# Altium PCB PCB1.PcbDoc (part 1 of 2)
Units mm, origin at the board's own origin, x right, y up, seen from the top; angles counter-clockwise.
Board outline 142.1 x 63.5 mm, 2 copper layers (Top Layer, Bottom Layer); 91 components, 105 nets, 352 pads, 86 vias.
Unrouted connection lines stored in the file: 3.
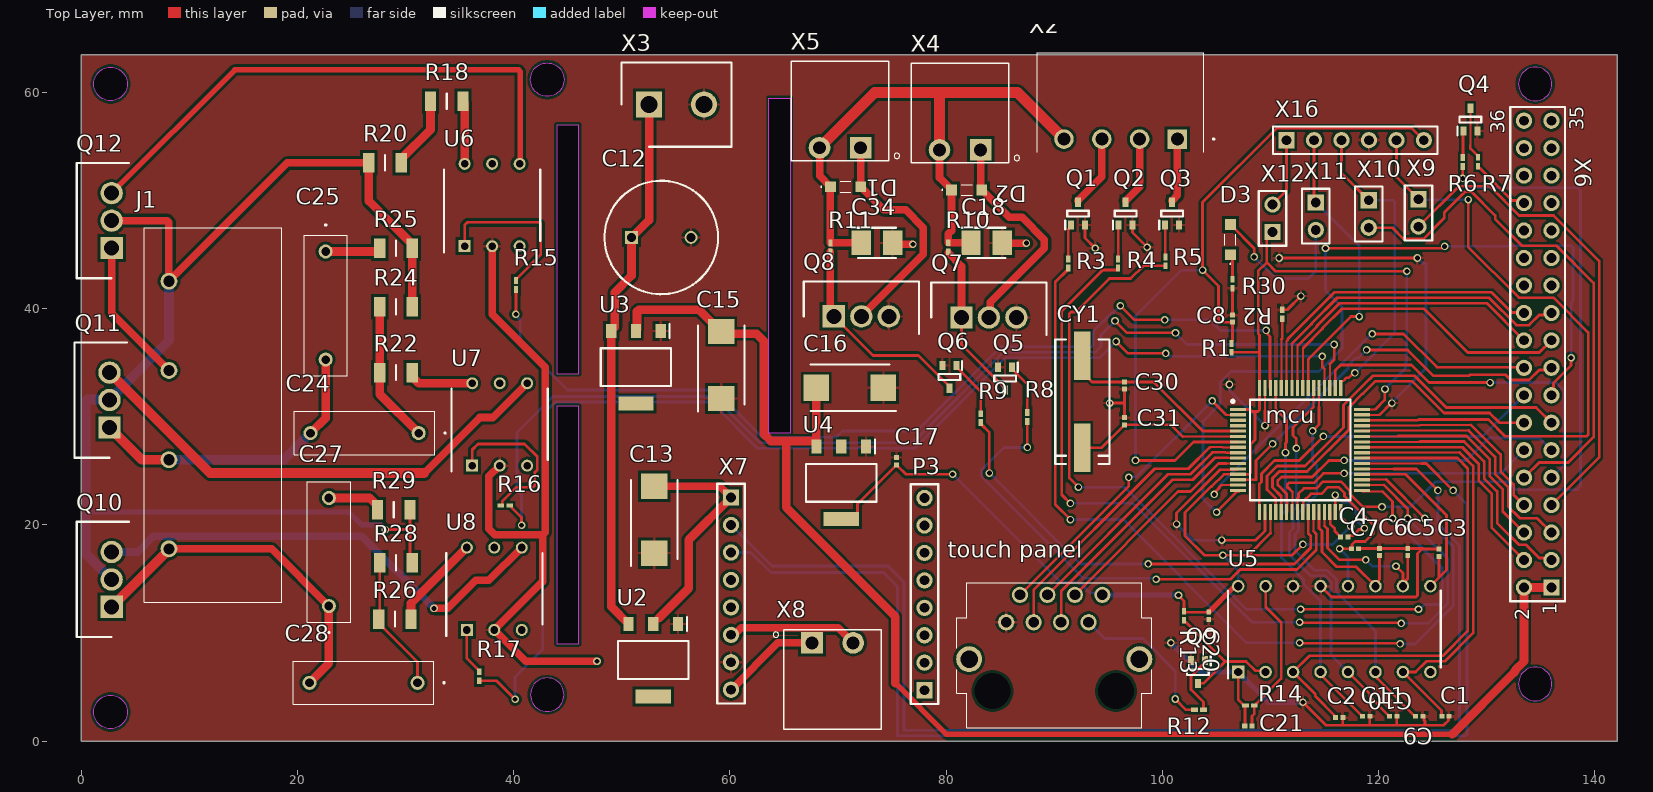
[diagram p0: Top Layer view]
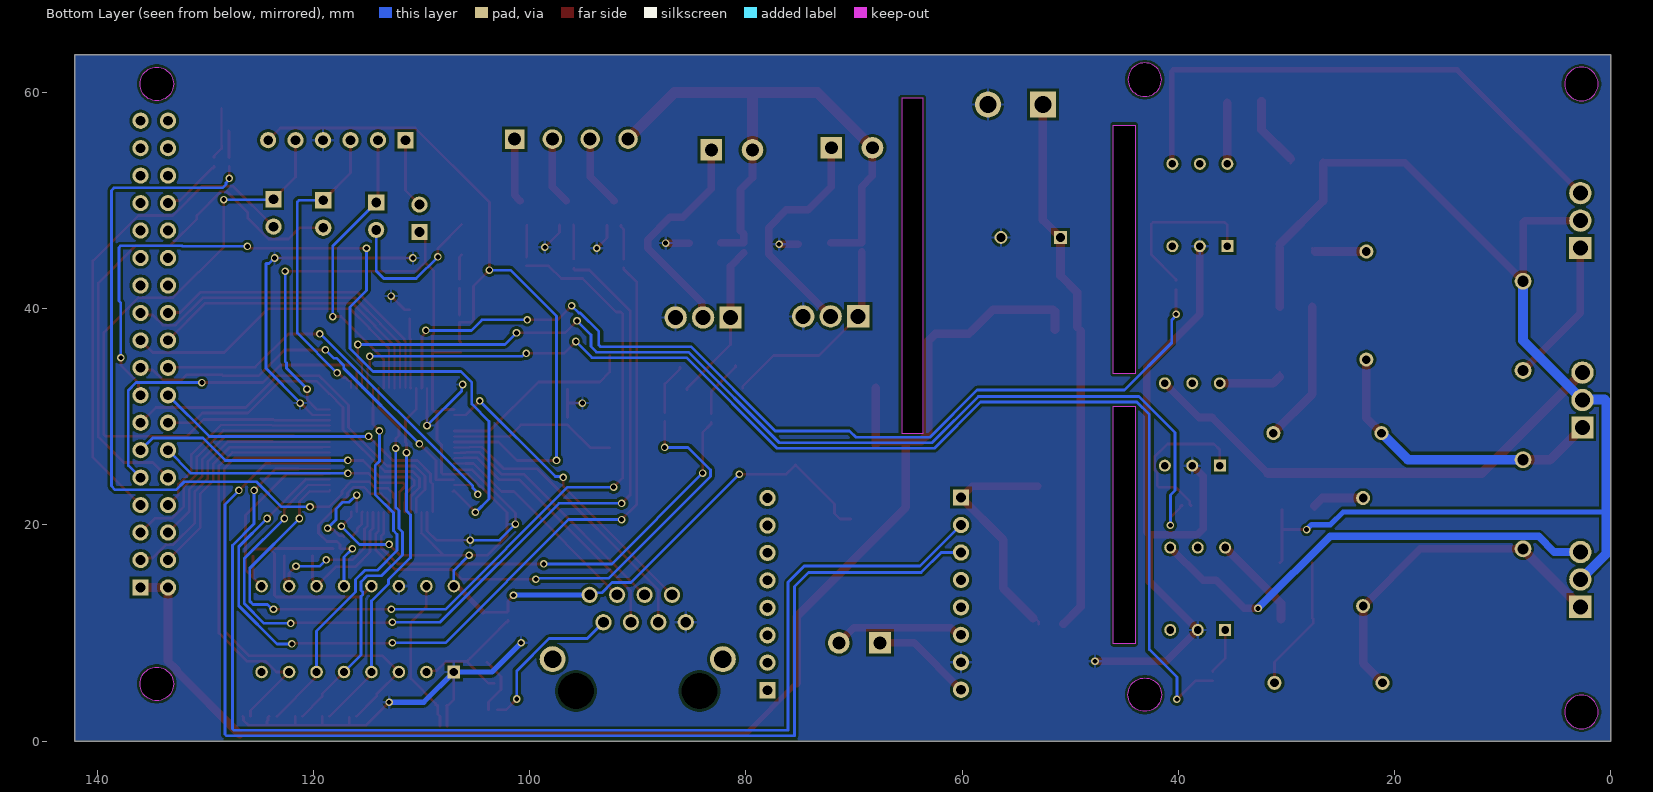
[diagram p1: Bottom Layer view, seen from below]

## Layer stack, top to bottom
Top Solder: solder mask 0.0102, Solder Resist, Dk 3.5
Top Layer: signal copper 0.0356
Dielectric 1: dielectric 0.32, FR-4, Dk 4.8
Bottom Layer: signal copper 0.0356
Bottom Solder: solder mask 0.0102, Solder Resist, Dk 3.5

## Board outline
0,0 142.1,0 142.1,63.5 0,63.5
cut-out: 2.7,1.148 cw(c2.7,2.7) 1.148,2.7 cw(c2.7,2.7) 2.7,4.252 cw(c2.7,2.7) 4.252,2.7 cw(c2.7,2.7)
cut-out: 2.7,59.248 cw(c2.7,60.8) 1.148,60.8 cw(c2.7,60.8) 2.7,62.352 cw(c2.7,60.8) 4.252,60.8 cw(c2.7,60.8)
cut-out: 43.1,59.648 cw(c43.1,61.2) 41.548,61.2 cw(c43.1,61.2) 43.1,62.752 cw(c43.1,61.2) 44.652,61.2 cw(c43.1,61.2)
cut-out: 41.548,4.3 ccw(c43.1,4.3) 43.1,2.748 ccw(c43.1,4.3) 44.652,4.3 ccw(c43.1,4.3) 43.1,5.852 ccw(c43.1,4.3)
cut-out: 132.948,5.3 ccw(c134.5,5.3) 134.5,3.748 ccw(c134.5,5.3) 136.052,5.3 ccw(c134.5,5.3) 134.5,6.852 ccw(c134.5,5.3)
cut-out: 132.948,60.8 ccw(c134.5,60.8) 134.5,59.248 ccw(c134.5,60.8) 136.052,60.8 ccw(c134.5,60.8) 134.5,62.352 ccw(c134.5,60.8)
cut-out: 46,31 44,31 44,9 46,9
cut-out: 46,34 46,57 44,57 44,34
cut-out: 63.6,59.5 65.6,59.5 65.6,28.5 63.6,28.5

## Design rules (kind name [scope] priority, off if disabled: settings)
Clearance [All] p1: gap=0.254 ignorepadtopadclearanceinfootprint=FALSE except(0: Arc-Hole Track-Hole SMDPad-Hole THPad-Hole Via-Hole Fill-Hole Poly-Hole Region-Hole Text-Hole)
PolygonConnect [All] p1: connectstyle=Relief reliefconductorwidth=0.254 reliefentries=4 polygonreliefangle="90 Angle" airgapwidth=0.254
RoutingVias [All] p1: holewidth=0.711 width=1.27 viastyle="Through Hole" minholewidth=0.711 minwidth=1.27 maxholewidth=0.711 maxwidth=1.27
SolderMaskExpansion [All] p1: expansion=0.102 istentingtop=FALSE
Width [All] p1: maxlimit=0.254 minlimit=0.254 preferedwidth=0.254
30 further rules are at their usual default settings.

## Components (designator, comment, footprint, x,y, rotation, side; value= is the part's Value field where it differs from the comment)
C1 "02013A0R5CAT2A" CAPC0603X33N 126.2,2.3 r0 top
C2 "02013A0R5CAT2A" CAPC0603X33N 116.365,2.2 r0 top
C3 "02013A0R5CAT2A" CAPC0603X33N 125.6,17.435 r90 top
C4 "02013A100BAT2A" CAPC0603X33N 116.835,18.9 r180 top
C5 "02013A0R5CAT2A" CAPC0603X33N 122.7,17.5 r90 top
C6 "02013A0R5CAT2A" CAPC0603X33N 120.1,17.5 r90 top
C7 "02013A0R5CAT2A" CAPC0603X33N 117.835,17.8 r0 top
C8 "02013A0R5CAT2A" CAPC0603X33N 106.5,39.1 r90 top
C9 "02013A0R5CAT2A" CAPC0603X33N 123.765,2.3 r0 top
C10 "02013A0R5CAT2A" CAPC0603X33N 121.365,2.3 r0 top
C11 "02013A0R5CAT2A" CAPC0603X33N 118.865,2.3 r0 top
C12 "108CKE025M" CAPPRD550W60D1050H2150 50.9,46.6 r0 top
C13 "293D107X9016DW2E3" CAPPM7343X310N 53,20.5 r90 top
C15 "293D107X9016DW2E3" CAPPM7343X310N 59.2,34.8 r90 top
C16 "293D107X9016DW2E3" CAPPM7343X310N 71.1,32.7 r180 top
C17 "02013A0R5CAT2A" CAPC0603X33N 75.4,25.9 r90 top
C18 "TH3B685M016C1800" CAPPM3528X210N 83.75,46.1 r0 top (schematic designator C?)
C20 "02013A0R5CAT2A" CAPC0603X33N 104.3,11.6 r270 top
C21 "02013A0R5CAT2A" CAPC0603X33N 107.965,1.4 r0 top
C24 "B32921C3333M" B32921C3333M 31.2,28.5 r180 top
C25 "B32921C3333M" B32921C3333M 22.6,45.3 r270 top
C27 "B32921C3333M" B32921C3333M 22.9,12.5 r90 top
C28 "B32921C3333M" B32921C3333M 31.1,5.4 r180 top
C30 "02013A100BAT2A" CAPC0603X33N 96.5,32.9 r90 top
C31 "02013A100BAT2A" CAPC0603X33N 96.5,29.6 r270 top
C34 "TH3B685M016C1800" CAPPM3528X210N 73.6,46.1 r0 top
CY1 "ECS-110-S-5P" CSM-7 92.6,31.4 r90 top
D1 "12-21_S2C-FR2S2L_2C" 1221S2CFR2S2L2C 70.7,51.3 r0 top
D2 "12-21_S2C-FR2S2L_2C" 1221S2CFR2S2L2C 81.9,51 r0 top
D3 "12-21_S2C-FR2S2L_2C" 1221S2CFR2S2L2C 106.3,46.4 r90 top
J1 "1-1437667-0" 114376670 8.1,17.79 r90 top
mcu "STM32F411RET6TR" QFP50P1200X1200X160-64N 112.75,26.938 r0 top
P3 "Header 8" HDR1X8 78,4.72 r90 top
Q1 "BFT92W" SOT65P210X110-3N 92.2,48.8 r90 top
Q2 "BFT92W" SOT65P210X110-3N 96.6,48.8 r90 top
Q3 "BFT92W" SOT65P210X110-3N 100.9,48.8 r90 top
Q4 "BFT92W" SOT65P210X110-3N 128.5,57.5 r90 top
Q5 "BFT92W" SOT65P210X110-3N 85.45,33.55 r270 top
Q6 "BFT92W" SOT65P210X110-3N 80.3,33.7 r270 top
Q7 "IRFZ48NPBF" TO254P483X1016X1994-3P 81.42,39.2 r0 top
Q8 "IRFZ48NPBF" TO254P483X1016X1994-3P 69.62,39.3 r0 top
Q9 "BFT92W" SOT65P210X110-3N 103.3,6.4 r270 top
Q10 "ISITICI_1" TO254P483X1016X1994-3P 2.8,12.42 r90 top
Q11 "ISITICI_2" TO254P483X1016X1994-3P 2.6,29.02 r90 top
Q12 "MOTOR" TO254P483X1016X1994-3P 2.8,45.62 r90 top
R1 "CPF0201D100RE1" RESC0603X28N 106.4,36.388 r270 top
R2 "CPF0201D100RE1" RESC0603X28N 111.1,39.5 r270 top
R3 "GREEN" RESC0603X28N 91.3,44.188 r270 top
R4 "RED" RESC0603X28N 95.9,44.188 r270 top
R5 "BLUE" RESC0603X28N 100.3,44.388 r270 top
R6 "CPF0201D100RE1" RESC0603X28N 127.8,53.588 r90 top
R7 "CPF0201D100RE1" RESC0603X28N 129.2,53.6 r90 top
R8 "CPF0201D100RE1" RESC0603X28N 87.5,29.988 r90 top
R9 "CPF0201D100RE1" RESC0603X28N 83.2,29.888 r90 top
R10 "CPF0201D100RE1" RESC0603X28N 80.2,45.7 r270 top
R11 "CPF0201D100RE1" RESC0603X28N 69.3,45.688 r270 top
R12 "CPF0201D100RE1" RESC0603X28N 103.388,2.9 r180 top
R13 "CPF0201D100RE1" RESC0603X28N 102,11.6 r270 top
R14 "CPF0201D100RE1" RESC0603X28N 108.1,3.3 r0 top
R15 "CPF0201D100RE1" RESC0603X28N 40.2,42.2 r270 top
R16 "CPF0201D100RE1" RESC0603X28N 39.212,21.8 r0 top
R17 "CPF0201D100RE1" RESC0603X28N 36.8,6 r270 top
R18 "CRCW12061K00JNEAC" RESC3216X60N 33.8,59.2 r0 top
R20 "CRCW12061K00JNEAC" RESC3216X60N 28.1,53.5 r180 top
R22 "CRCW12061K00JNEAC" RESC3216X60N 29.1,34.1 r0 top
R24 "CRCW12061K00JNEAC" RESC3216X60N 29.1,40.2 r180 top
R25 "CRCW12061K00JNEAC" RESC3216X60N 29.1,45.6 r0 top
R26 "CRCW12061K00JNEAC" RESC3216X60N 29,11.3 r0 top
R28 "CRCW12061K00JNEAC" RESC3216X60N 29.1,16.5 r180 top
R29 "CRCW12061K00JNEAC" RESC3216X60N 28.9,21.4 r0 top
R30 "CPF0201D100RE1" RESC0603X28N 106.5,42.312 r90 top
"touch panel" "100616-2" 1006162 94.45,13.54 r270 top
U2 "AMS1117-5.0" SOT229P700X180-4N 52.9,7.5 r270 top
U3 "AMS1117-5.0" SOT229P700X180-4N 51.3,34.6 r270 top
U4 "AMS1117-5.0" SOT229P700X180-4N 70.3,23.9 r270 top
U5 "ULN2003A" DIP794W56P254L1888H533Q16N 115.91,10.37 r90 top
U6 "MOC3083SM" DIP762W51P254L851H508Q6N 38,49.6 r90 top
U7 "MOC3083SM" DIP762W51P254L851H508Q6N 38.7,29.3 r90 top
U8 "MOC3083SM" DIP762W51P254L851H508Q6N 38.2,14.1 r90 top
X2 "RGB" 1844236 101.4,55.7 r180 top
X3 "+12V GND" SHDR2W100P0X508_1X2_1020X780X1200P 52.52,58.9 r0 top
X4 "ALEV" PHOENIX_1803277 81.295,54.7 r180 top
X5 "ODUN" PHOENIX_1803277 70.195,54.9 r180 top
X6 "Header 18X2" HDR2X18 136,14.22 r90 top (schematic designator header)
X7 "speaker" HDR1X8 60.1,22.54 r270 top
X8 "" PHOENIX_1803277 69.5,9.1 r0 top
X9 "Header 2" HDR1X2 123.7,50.14 r270 top
X10 "Header 2" HDR1X2 119.1,50.04 r270 top
X11 "Header 2" HDR1X2 114.2,49.84 r270 top
X12 "Header 2" HDR1X2 110.2,47.1 r90 top
X16 "program socket" HDR1X6 111.5,55.6 r0 top

## Footprints (in the part's own frame and the unit in brackets; to place one, negate y for a bottom-side part, rotate by r counter-clockwise, add the part's x,y. Pads: shape width x height; smd on the part's side, far side on the other; paste and mask are expansions set on the pad)
1221S2CFR2S2L2C [mm]
  rect 1x1 smd: 1(-1.4,0) 2(1.4,0)
  silkscreen extent -2.3,-0.5 0.5,0.5, body extent -1.5,-0.5 1.5,0.5, height 1.89
1006162 [mm]
  round 1.5 hole 1: 1(0,0) 2(2.54,-1.27) 3(0,-2.54) 4(2.54,-3.81) 5(0,-5.08) 6(2.54,-6.35) 7(0,-7.62) 8(2.54,-8.89)
  round 2.4 hole 1.6: MH1(5.95,3.43) MH2(5.95,-12.32)
  round 1.665 hole 3.33 unplated: MH3(8.9,1.27) MH4(8.9,-10.16)
  silkscreen extent -1.1,-13.44 12.3,4.55, body extent -0.79,-13.47 12.61,4.53, height 16.61
1844236 [mm]
  rect 1.8x1.8 hole 1.2: 1(0,0)
  round 1.8 hole 1.2: 2(3.5,0) 3(7,0) 4(10.5,0)
  silkscreen extent -3.4,-8 12.95,1.2, body extent 0,-3.4 9.2,7.25, height 2.45
114376670 [mm]
  round 1.557 hole 1.038: 1(0,0) 2(8.255,0) 3(16.51,0) 4(24.765,0)
  silkscreen extent -4.95,-10.41 29.72,2.29, body extent -4.96,-10.41 29.72,2.29, height 13.47
B32921C3333M [mm]
  round 1.3 hole 0.8: 1(0,0) 2(10,0)
  silkscreen extent -2.5,-2 11.5,2, body extent -1.5,-2 11.5,2, height 9.1
CAPC0603X33N [mm]
  rect 0.47x0.44 smd: 1(-0.335,0) 2(0.335,0)
  body extent -0.3,-0.15 0.3,0.15, height 0.33
CAPPM3528X210N [mm]
  rect 1.8x2.25 smd: 1(-1.45,0) 2(1.45,0)
  silkscreen extent -2.35,-1.4 1.75,1.4, body extent -1.86,-1.54 1.87,1.53, height 2.13
CAPPM7343X310N [mm]
  rect 2.35x2.45 smd: 1(-3.1,0) 2(3.1,0)
  silkscreen extent -4.28,-2.15 3.65,2.15, body extent -3.59,-2.21 3.6,2.21, height 2.92
CAPPRD550W60D1050H2150 [mm]
  rect 1.2x1.2 hole 0.8: 1(0,0)
  round 1.2 hole 0.8: 2(5.5,0)
  silkscreen extent -2.5,-5.25 8,5.25, body extent -2.5,-5.25 8,5.25, height 21.5
CSM-7 [mm] "Quartz Crystal, SM; 2 Leads; Body 11.4 x 4.8 x 5 mm (LxWxH)"
  rect 4.5x1.5 smd: 1(-4.25,0) 2(4.25,0)
  silkscreen extent -5.75,-2.5 5.75,2.5
DIP762W51P254L851H508Q6N [mm]
  rect 1.11x1.11 hole 0.71: 1(-3.81,2.54)
  round 1.11 hole 0.71: 2(-3.81,0) 3(-3.81,-2.54) 4(3.81,-2.54) 5(3.81,0) 6(3.81,2.54)
  silkscreen extent -4.37,-4.44 3.3,4.44, body extent -3.94,-4.26 3.94,4.26, height 5.08
DIP794W56P254L1888H533Q16N [mm]
  rect 1.16x1.16 hole 0.76: 1(-3.97,8.89)
  round 1.16 hole 0.76: 2(-3.97,6.35) 3(-3.97,3.81) 4(-3.97,1.27) 5(-3.97,-1.27) 6(-3.97,-3.81) 7(-3.97,-6.35) 8(-3.97,-8.89) 9(3.97,-8.89) 10(3.97,-6.35) 11(3.97,-3.81) 12(3.97,-1.27) 13(3.97,1.27) 14(3.97,3.81) 15(3.97,6.35) 16(3.97,8.89)
  silkscreen extent -4.55,-9.84 3.55,9.84, body extent -4.11,-9.45 4.11,9.45, height 5.33
HDR1X2 [mm] "Connector; Header; 2 Position"
  rect 1.5x1.5 hole 0.9: 1(0,0)
  round 1.5 hole 0.9: 2(2.54,0)
  silkscreen extent -1.27,-1.27 3.81,1.27
HDR1X6 [mm] "Connector; Header; 6 Position"
  rect 1.5x1.5 hole 0.9: 1(0,0)
  round 1.5 hole 0.9: 2(2.54,0) 3(5.08,0) 4(7.62,0) 5(10.16,0) 6(12.7,0)
  silkscreen extent -1.27,-1.27 13.97,1.27
HDR1X8 [mm] "Connector; Header; 8 Position"
  rect 1.5x1.5 hole 0.9: 1(0,0)
  round 1.5 hole 0.9: 2(2.54,0) 3(5.08,0) 4(7.62,0) 5(10.16,0) 6(12.7,0) 7(15.24,0) 8(17.78,0)
  silkscreen extent -1.27,-1.27 19.05,1.27
HDR2X18 [mm] "Connector; Header; 18x2 Position"
  rect 1.5x1.5 hole 0.9: 1(0,0)
  round 1.5 hole 0.9: 2(0,2.54) 3(2.54,0) 4(2.54,2.54) 5(5.08,0) 6(5.08,2.54) 7(7.62,0) 8(7.62,2.54) 9(10.16,0) 10(10.16,2.54) 11(12.7,0) 12(12.7,2.54) 13(15.24,0) 14(15.24,2.54) 15(17.78,0) 16(17.78,2.54) 17(20.32,0) 18(20.32,2.54) 19(22.86,0) 20(22.86,2.54) 21(25.4,0) 22(25.4,2.54) 23(27.94,0) 24(27.94,2.54) 25(30.48,0) 26(30.48,2.54) 27(33.02,0) 28(33.02,2.54) 29(35.56,0) 30(35.56,2.54) 31(38.1,0) 32(38.1,2.54) 33(40.64,0) 34(40.64,2.54) 35(43.18,0) 36(43.18,2.54)
  silkscreen extent -1.27,-1.27 44.45,3.81
PHOENIX_1803277 [mm]
  rect 2x2 hole 1.2: 1(-1.905,0)
  round 2 hole 1.2: 2(1.905,0)
  silkscreen extent -5.5,-8 4.5,1.2
QFP50P1200X1200X160-64N [mm]
  rect 1.475x0.3 smd: 1(-5.738,3.75) 2(-5.738,3.25) 3(-5.738,2.75) 4(-5.738,2.25) 5(-5.738,1.75) 6(-5.738,1.25) 7(-5.738,0.75) 8(-5.738,0.25) 9(-5.738,-0.25) 10(-5.738,-0.75) 11(-5.738,-1.25) 12(-5.738,-1.75) 13(-5.738,-2.25) 14(-5.738,-2.75) 15(-5.738,-3.25) 16(-5.738,-3.75) 33(5.738,-3.75) 34(5.738,-3.25) 35(5.738,-2.75) 36(5.738,-2.25) 37(5.738,-1.75) 38(5.738,-1.25) 39(5.738,-0.75) 40(5.738,-0.25) 41(5.738,0.25) 42(5.738,0.75) 43(5.738,1.25) 44(5.738,1.75) 45(5.738,2.25) 46(5.738,2.75) 47(5.738,3.25) 48(5.738,3.75)
  rect 0.3x1.475 smd: 17(-3.75,-5.738) 18(-3.25,-5.738) 19(-2.75,-5.738) 20(-2.25,-5.738) 21(-1.75,-5.738) 22(-1.25,-5.738) 23(-0.75,-5.738) 24(-0.25,-5.738) 25(0.25,-5.738) 26(0.75,-5.738) 27(1.25,-5.738) 28(1.75,-5.738) 29(2.25,-5.738) 30(2.75,-5.738) 31(3.25,-5.738) 32(3.75,-5.738) 49(3.75,5.738) 50(3.25,5.738) 51(2.75,5.738) 52(2.25,5.738) 53(1.75,5.738) 54(1.25,5.738) 55(0.75,5.738) 56(0.25,5.738) 57(-0.25,5.738) 58(-0.75,5.738) 59(-1.25,5.738) 60(-1.75,5.738) 61(-2.25,5.738) 62(-2.75,5.738) 63(-3.25,5.738) 64(-3.75,5.738)
  silkscreen extent -6.35,-4.65 4.65,4.65, body extent -6,-6 6,6, height 1.6
RESC0603X28N [mm]
  rect 0.625x0.4 smd: 1(-0.412,0) 2(0.412,0)
  body extent -0.29,-0.15 0.29,0.15, height 0.28
RESC3216X60N [mm]
  rect 1.05x1.8 smd: 1(-1.5,0) 2(1.5,0)
  silkscreen extent 0,-0.7 0,0.7, body extent -1.58,-0.8 1.58,0.8, height 0.6
SHDR2W100P0X508_1X2_1020X780X1200P [mm]
  rect 2.4x2.4 hole 1.6: 1(0,0)
  round 2.4 hole 1.6: 2(5.08,0)
  silkscreen extent -2.56,-3.9 7.64,3.9, body extent -2.56,-3.9 7.64,3.9, height 12
SOT65P210X110-3N [mm]
  rect 0.85x0.55 smd: 1(-1.05,0.65) 2(-1.05,-0.65) 3(1.05,0)
  silkscreen extent -1.48,-1 0.28,1.17, body extent -1.05,-1 1.05,1, height 1.1
SOT229P700X180-4N [mm]
  rect 1.3x0.95 smd: 1(-3.35,2.29) 2(-3.35,0) 3(-3.35,-2.29)
  rect 1.3x3.25 smd: 4(3.35,0)
  silkscreen extent -4,-3.25 1.75,3.25, body extent -3.5,-3.25 3.5,3.25, height 1.8
TO254P483X1016X1994-3P [mm]
  rect 2.07x2.07 hole 1.38: 1(0,0)
  round 2.07 hole 1.38: 2(2.54,0) 3(5.08,0)
  silkscreen extent -2.8,-1.61 7.88,3.22, body extent -2.54,-1.61 7.62,3.22, height 18.86

## Part data
C1 C2 C3 C5 C6 C7 C8 C9 C10 C11 C17 C20 C21: "Capacitor", Manufacturer_Name=AVX, Mouser Part Number=581-02013A0R5C, Arrow Part Number=02013A0R5CAT2A, Arrow Price/Stock=https://www.arrow.com/en/products/02013a0r5cat2a/avx, Datasheet Link=http://www.mouser.com/catalog/supplier/library/pdf/AVXSurfaceMountCeramic.pdf, Height=0.33mm, Manufacturer_Part_Number=02013A0R5CAT2A, Mouser Price/Stock=https://www.mouser.co.uk/ProductDetail/AVX/02013A0R5CAT2A?qs=Thry1QCnmXB3nXCuXCgVMw%3D%3D
C4 C30 C31: "Capacitor", Manufacturer_Name=AVX, Mouser Part Number=581-02013A100BAT2A, Datasheet Link=http://www.mouser.com/catalog/supplier/library/pdf/AVXSurfaceMountCeramic.pdf, Height=0.33mm, Manufacturer_Part_Number=02013A100BAT2A, Mouser Price/Stock=https://www.mouser.com/Search/Refine.aspx?Keyword=581-02013A100BAT2A
C12: "Capacitor Polarised", Manufacturer_Name="Cinch Connectivity Solutions", Datasheet Link=https://componentsearchengine.com/Datasheets/2/108CKE025M.pdf, Height=21.5mm, Manufacturer_Part_Number=108CKE025M
C13 C15 C16 C18 C34: "Capacitor Polarised", Manufacturer_Name=Vishay
  C13 C15 C16: Datasheet Link=http://www.vishay.com/docs/40002/293d.pdf, Height=3.1mm, Manufacturer_Part_Number=293D107X9016DW2E3
  C18 C34: Datasheet Link=http://www.vishay.com/doc?40084, Height=2.1mm, Manufacturer_Part_Number=TH3B685M016C1800
C24 C25 C27 C28: "Capacitor", Manufacturer_Name=TDK, Mouser Part Number=871-B32921C3333M, Arrow Part Number=B32921C3333M, Arrow Price/Stock=https://www.arrow.com/en/products/b32921c3333m/epcos-tdk, Datasheet Link=https://www.tdk-electronics.tdk.com/inf/20/20/db/fc_2009/X2_B32921_928.pdf, Height=9mm, Manufacturer_Part_Number=B32921C3333M, Mouser Price/Stock=https://www.mouser.com/Search/Refine.aspx?Keyword=871-B32921C3333M
CY1: "Crystal Oscillator", ComponentLink1Description="Manufacturer Link", ComponentLink1URL=http://www.ecsxtal.com/, ComponentLink2Description=Datasheet, ComponentLink2URL=http://www.ecsxtal.com/pdf3/CSM_7.pdf, DatasheetDocument=18-Apr-2000, PackageReference=CSM-7, Published=17-Jul-2002, Publisher="Altium Limited"
D1 D2 D3: "LED", Manufacturer_Name="EVERLIGHT ELECTRONICS", Manufacturer_Part_Number=12-21/S2C-FR2S2L/2C, Datasheet Link=https://datasheet.lcsc.com/szlcsc/1901141904_Everlight-Elec-12-21-S2C-FR2S2L-2C_C183856.pdf, Height=2.2mm
J1: "Connector", Manufacturer_Name="TE Connectivity", Mouser Part Number=N/A, Datasheet Link=http://uk.rs-online.com/web/p/products/8212655, Height=13.97mm, Manufacturer_Part_Number=1-1437667-0, Mouser Price/Stock=https://www.mouser.com/Search/Refine.aspx?Keyword=N%2FA
mcu: "Integrated Circuit", Manufacturer_Name=STMicroelectronics, Mouser Part Number=511-STM32F411RET6TR, Arrow Part Number=STM32F411RET6TR, Arrow Price/Stock=https://www.arrow.com/en/products/stm32f411ret6tr/stmicroelectronics?region=nac, Datasheet Link=https://www.st.com/resource/en/datasheet/stm32f411re.pdf, Height=1.6mm, Manufacturer_Part_Number=STM32F411RET6TR, Mouser Price/Stock=https://www.mouser.co.uk/ProductDetail/STMicroelectronics/STM32F411RET6TR?qs=BA62vJVifGpaf6czDatkOw%3D%3D
P3: "Header, 8-Pin", LatestRevisionDate=17-Jul-2002, LatestRevisionNote="Re-released for DXP Platform.", Publisher="Altium Limited"
Q1 Q2 Q3 Q4 Q5 Q6 Q9: "Transistor BJT NPN", Manufacturer_Name=NXP, Mouser Part Number=N/A, Datasheet Link=http://uk.rs-online.com/web/p/products/3803228, Height=1.1mm, Manufacturer_Part_Number=BFT92W, Mouser Price/Stock=https://www.mouser.co.uk/ProductDetail/NXP-Semiconductors/BFT92W/?qs=fAHHVMwC%252BbirqGt1esWTqQ%3D%3D
Q7 Q8: "Transistor", Manufacturer_Name=Infineon, Mouser Part Number=942-IRFZ48NPBF, Arrow Part Number=IRFZ48NPBF, Arrow Price/Stock=https://www.arrow.com/en/products/irfz48npbf/infineon-technologies-ag?region=nac, Datasheet Link=https://componentsearchengine.com/Datasheets/2/IRFZ48NPBF.pdf, Height=4.83mm, Manufacturer_Part_Number=IRFZ48NPBF, Mouser Price/Stock=https://www.mouser.co.uk/ProductDetail/Infineon-IR/IRFZ48NPBF?qs=9%252BKlkBgLFf0aUlYGH00miQ%3D%3D
Q10 Q11 Q12: library part IRFZ48NPBF, "Transistor", Manufacturer_Name=Infineon, Mouser Part Number=942-IRFZ48NPBF, Arrow Part Number=IRFZ48NPBF, Arrow Price/Stock=https://www.arrow.com/en/products/irfz48npbf/infineon-technologies-ag?region=nac, Datasheet Link=https://componentsearchengine.com/Datasheets/2/IRFZ48NPBF.pdf, Height=4.83mm, Manufacturer_Part_Number=IRFZ48NPBF, Mouser Price/Stock=https://www.mouser.co.uk/ProductDetail/Infineon-IR/IRFZ48NPBF?qs=9%252BKlkBgLFf0aUlYGH00miQ%3D%3D
R1 R2 R6 R7 R8 R9 R10 R11 R12 R13 R14 R15 R16 R17 R30: "Resistor", Manufacturer_Name="TE Connectivity", Mouser Part Number=279-CPF0201D100RE1, Arrow Part Number=CPF0201D100RE1, Arrow Price/Stock=https://www.arrow.com/en/products/cpf0201d100re1/te-connectivity?region=nac, Datasheet Link=http://www.te.com/commerce/DocumentDelivery/DDEController?Action=showdoc&DocId=Data+Sheet%7F1773200-1%7FA%7Fpdf%7FEnglish%7FENG_DS_1773200-1_A.pdf%7F4-2176215-6, Height=0.28mm, Manufacturer_Part_Number=CPF0201D100RE1, Mouser Price/Stock=https://www.mouser.co.uk/ProductDetail/TE-Connectivity-Holsworthy/CPF0201D100RE1?qs=gt1LBUVyoHlmoWock10t3Q%3D%3D
R3 R4 R5: library part CPF0201D100RE1, "Resistor", Manufacturer_Name="TE Connectivity", Mouser Part Number=279-CPF0201D100RE1, Arrow Part Number=CPF0201D100RE1, Arrow Price/Stock=https://www.arrow.com/en/products/cpf0201d100re1/te-connectivity?region=nac, Datasheet Link=http://www.te.com/commerce/DocumentDelivery/DDEController?Action=showdoc&DocId=Data+Sheet%7F1773200-1%7FA%7Fpdf%7FEnglish%7FENG_DS_1773200-1_A.pdf%7F4-2176215-6, Height=0.28mm, Manufacturer_Part_Number=CPF0201D100RE1, Mouser Price/Stock=https://www.mouser.co.uk/ProductDetail/TE-Connectivity-Holsworthy/CPF0201D100RE1?qs=gt1LBUVyoHlmoWock10t3Q%3D%3D
R18 R20 R22 R24 R25 R26 R28 R29: "Resistor", Manufacturer_Name=Vishay, Mouser Part Number=71-CRCW12061K00JNEAC, Arrow Part Number=CRCW12061K00JNEAC, Arrow Price/Stock=https://www.arrow.com/en/products/crcw12061k00jneac/vishay?region=nac, Datasheet Link=http://componentsearchengine.com/Datasheets/1/CRCW12061K00JNEAC.pdf, Height=0.6mm, Manufacturer_Part_Number=CRCW12061K00JNEAC, Mouser Price/Stock=https://www.mouser.co.uk/ProductDetail/Vishay-Dale/CRCW12061K00JNEAC?qs=E3Y5ESvWgWPIcSNZLfmhag%3D%3D
"touch panel": "Connector", Manufacturer_Name="TE Connectivity", Mouser Part Number=571-100616-2, Arrow Part Number=100616-2, Arrow Price/Stock=https://www.arrow.com/en/products/100616-2/te-connectivity?region=nac, Datasheet Link=http://www.te.com/commerce/DocumentDelivery/DDEController?Action=showdoc&DocId=Customer+Drawing%7F100616%7FP%7Fpdf%7FEnglish%7FENG_CD_100616_P.pdf%7F100616-2, Height=16mm, Manufacturer_Part_Number=100616-2, Mouser Price/Stock=https://www.mouser.co.uk/ProductDetail/TE-Connectivity/100616-2?qs=dNLUg1dAArz2vweU495O%2FQ%3D%3D
U2 U3 U4: "Integrated Circuit", Manufacturer_Name="Advanced Monolithic Systems", Datasheet Link=http://www.advanced-monolithic.com/pdf/ds1117.pdf, Height=1.8mm, Manufacturer_Part_Number=AMS1117-5.0
U5: "Integrated Circuit", Manufacturer_Name=STMicroelectronics, Mouser Part Number=511-ULN2003A, Arrow Part Number=ULN2003A, Arrow Price/Stock=https://www.arrow.com/en/products/uln2003a/stmicroelectronics?region=nac, Datasheet Link=http://www.st.com/web/en/resource/technical/document/datasheet/CD00001244.pdf, Height=5.33mm, Manufacturer_Part_Number=ULN2003A, Mouser Price/Stock=https://www.mouser.co.uk/ProductDetail/STMicroelectronics/ULN2003A?qs=FOlmdCx%252BAA1P2avu3tWCRw%3D%3D
U6 U7 U8: "Integrated Circuit", Manufacturer_Name="ON Semiconductor", Mouser Part Number=512-MOC3083SM, Arrow Part Number=MOC3083SM, Arrow Price/Stock=https://www.arrow.com/en/products/moc3083sm/on-semiconductor, Datasheet Link=https://datasheet.datasheetarchive.com/originals/distributors/Datasheets_SAMA/5a20506ac1f500cd6310533ed5733ab7.pdf, Height=5.08mm, Manufacturer_Part_Number=MOC3083SM, Mouser Price/Stock=https://www.mouser.co.uk/ProductDetail/ON-Semiconductor-Fairchild/MOC3083SM?qs=D3DIWr27d5uvu753vimOug%3D%3D
X2: library part 1844236, "Connector", Manufacturer_Name="Phoenix Contact", Mouser Part Number=651-1844236, Arrow Part Number=1844236, Arrow Price/Stock=https://www.arrow.com/en/products/1844236/phoenix-contact, Datasheet Link=http://www.phoenixcontact.com/gb/produkte/1844236, Height=8.25mm, Manufacturer_Part_Number=1844236, Mouser Price/Stock=https://www.mouser.co.uk/ProductDetail/Phoenix-Contact/1844236?qs=DAHzmYU9cu1YEny1XwXz6g%3D%3D
X3: library part CTBP9308_2AO, "Connector", Manufacturer_Name=CAMDENBOSS, Manufacturer_Part_Number=CTBP9308/2AO, Datasheet Link=https://componentsearchengine.com/Datasheets/2/CTBP9308_2AO.pdf, Height=12mm
X4 X5 X8: library part 1803277, "2 Position Terminal Block Header, Male Pins, Shrouded _4 Side_ 0.150 _3.81mm_ 90Â°, Right Angle Through Hole", Package="FakePackage N", Digi-Key_Part_Number=277-1206-ND, Digi-Key_Purchase_URL=https://www.digikey.com/product-detail/en/phoenix-contact/1803277/277-1206-ND/260574?utm_source=snapeda&utm_medium=aggregator&utm_campaign=symbol, MF="Phoenix Contact", MP=1803277, SnapEDA_Link=https://www.snapeda.com/parts/1803277/Phoenix%20Contact/view-part/115436/?ref=snap
X6: "Header, 18-Pin, Dual row", LatestRevisionDate=17-Jul-2002, LatestRevisionNote="Re-released for DXP Platform.", Publisher="Altium Limited"
X7: library part "Header 8", "Header, 8-Pin", LatestRevisionDate=17-Jul-2002, LatestRevisionNote="Re-released for DXP Platform.", Publisher="Altium Limited"
X9 X10 X11 X12: "Header, 2-Pin", LatestRevisionDate=17-Jul-2002, LatestRevisionNote="Re-released for DXP Platform.", Publisher="Altium Limited"
X16: library part "Header 6", "Header, 6-Pin", LatestRevisionDate=17-Jul-2002, LatestRevisionNote="Re-released for DXP Platform.", Publisher="Altium Limited"

## Via types
v1: diameter 0.7, hole 0.45, Top Layer to Bottom Layer, 86 vias

## Nets (pads, with @x,y where several pads share a name; then routed paths per layer and width w, separated by ;. In a path a pad name is that pad's centre, name@x,y a point inside that pad or via, vN(x,y) a via of type N, cw(c..) or ccw(c..) an arc to the next point about the centre after c; other vN are vias at no path point)
C21_R14: C21.2 R14.2 U5.15 | length 14.7
  Top Layer w0.254: C21.2 108.3,2.319 108.512,2.531 R14.2 108.625,3.3 108.698,3.373 108.698,3.486 111,5.788 111,11 109.56,12.44 U5.15
C30_C31: 
pin2: "touch panel.7" mcu.2 | length 28.6
  Top Layer w0.2: 105.913,30.188 mcu.2
  Top Layer w0.254: 86.83,13.54 96.9,23.61 v1(96.9,24.4) ; v1(104.623,31.477) 105.913,30.188
  Bottom Layer w0.254: v1(96.9,24.4) 96.985,24.485 97.631,24.485 v1(104.623,31.477)
pin5: C30.2 CY1.2 mcu.5 | length 18.2
  Top Layer w0.254: CY1.2 92.6,34.15 93.515,33.235 C30.2 99.197,33.235 103.744,28.688 mcu.5
pin6: C31.2 CY1.1 mcu.6 | length 15.7
  Top Layer w0.2: 101.882,28.18 mcu.6@107.012,28.18
  Top Layer w0.254: CY1.1 94.385,27.15 96.392,29.157 96.407,29.157 96.5,29.25 C31.2 100.797,29.265 101.882,28.18
pin7: C8.1 mcu.7 R1.1 X16.6 | length 70.2
  Top Layer w0.254: v1(97.523,25.977) 101.167,25.977 102.878,27.688 mcu.7 ; R1.1 106.4,36.913 106.5,37.013 C8.1 105.435,38.765 105.2,39 105.2,42.101 v1(103.723,43.577) 103.723,49.862 110.592,56.731 123.069,56.731 X16.6
  Bottom Layer w0.254: v1(97.523,25.977) 97.523,39.323 101.777,43.577 v1(103.723,43.577)
pin8: "touch panel.6" mcu.8 | length 27.4
  Top Layer w0.2: 104.38,27.18 104.405,27.205 105.55,27.205 105.575,27.18 mcu.8@107.012,27.18
  Top Layer w0.254: 88.1,11 88.1,14 99.3,25.2 102.4,25.2 104.38,27.18
pin9: "touch panel.5" mcu.9 | length 23.1
  Top Layer w0.2: 105.351,26.724 105.843,26.724 105.883,26.684 106.374,26.684 106.407,26.651 mcu.9@107.012,26.651
  Top Layer w0.254: 89.37,13.54 100.522,24.692 102.61,24.692 104.642,26.724 105.351,26.724
pin10: "touch panel.4" mcu.10 | length 24.4
  Top Layer w0.2: 105.6,26.216 106.096,26.216 106.128,26.184 106.928,26.184 mcu.10@107.012,26.1
  Top Layer w0.254: 90.64,11 90.64,13.869 100.955,24.184 102.821,24.184 104.853,26.216 105.6,26.216
pin11: "touch panel.3" mcu.11 | length 20.1
  Top Layer w0.2: 105.906,25.688 mcu.11
  Top Layer w0.254: 91.91,13.54 101.47,23.1 102.6,23.1 105.188,25.688 105.906,25.688
pin12: "touch panel.8" C1.2 C2.2 C3.2 C5.2 C6.2 C7.2 C8.2 C9.2 C10.2 C11.2 C12.2 C13.1 C15.1 C16.1 C17.2 C18.2 C20.2 C30.1 C31.1 C34.2 mcu.12 mcu.18 mcu.47 mcu.63 Q1.2 Q2.2 Q3.2 Q4.2 Q5.2 Q6.2 Q7.3 Q8.3 Q9.2 R2.1 R30.1 U2.1 U3.1 U4.1 U5.1 U5.13 U5.14 U6.2 U7.2 U8.2 X3.2 X7.7 X16.4 | length 193.1
  Top Layer w0.2: 105.329,25.111 106.935,25.111 mcu.12 ; mcu.63@109.488,32.676 109.488,32.047 109.496,32.038 109.496,30.602 109.508,30.59 ; mcu.47 120.088,30.188
  Top Layer w0.254: C34.2 C34.2@75.173,45.977 ; C18.2 C18.2@85.223,46.077 ; Q1.2 92.85,46.55 v1(93.8,45.6) ; v1(95.123,31.277) 96.473,31.277 96.5,31.25 ; C31.1 96.5,31.25 ; C30.1 96.5,31.25 ; Q2.2 97.25,47.05 v1(98.6,45.7) ; v1(101.323,20.077) 101.323,21.105 105.329,25.111 ; v1(105.5,18.6) 108.646,18.6 109.5,19.454 mcu.18 ; C8.2 R30.1 ; v1(109.5,29.2) 109.5,29.994 109.508,30.002 109.508,30.59 ; v1(110.8,44.7) v1(123.6,44.7) ; R2.1 111.558,39.912 v1(112.823,41.177) ; v1(113,3.6) 115.119,1.481 119.2,1.481 ; U5.13 115.645,13.335 123.451,13.335 123.6,13.484 123.6,17.345 124.09,17.835 ; C2.2 116.7,1.549 116.768,1.481 ; C7.2 118.188,17.818 120.083,17.818 C6.2 C5.2 124.09,17.835 ; C11.2 119.2,1.481 ; 120.088,30.188 121.182,31.282 v1(121.241,31.282) ; C10.2 121.7,1.481 ; C9.2 124.115,2.3 124.208,2.207 124.208,1.932 124.3,1.84 124.3,1.481 ; C3.2 124.155,17.77 124.09,17.835 ; C1.2 126.481,2.246 126.481,1.922 126.04,1.481 124.3,1.481 ; 119.2,1.481 121.7,1.481 ; 121.7,1.481 124.3,1.481
  Top Layer w0.7: U6.2 38,39.5 42.907,34.593 42.907,19.323 42.684,19.1 ; U7.2 37.7,24.49 37.7,19.649 38.249,19.1 42.684,19.1 ; v1(47.7,7.4) 41.09,7.4 U8.2 42.684,14.774 42.684,19.1 ; C34.2@75.173,45.977 v1(76.923,45.977) ; C18.2@85.223,46.077 v1(87.423,46.077)
  Bottom Layer w0.254: v1(101.323,20.077) 102.801,18.6 v1(105.5,18.6) ; v1(106.2,33) 106.285,32.915 106.285,32.415 v1(109.5,29.2) ; v1(121.241,31.282) 121.241,31.341 124.4,34.5 124.4,44.2 124.134,44.2 123.634,44.7 v1(123.6,44.7)
  Bottom Layer w0.5: v1(100.8,9.1) 103.5,6.4 U5.1 109.82,3.6 v1(113,3.6)
pin14: mcu.14 X6.17 | length 37.1
  Top Layer w0.2: mcu.14@107.012,24.18 108.647,24.18
  Top Layer w0.254: 108.647,24.18 108.66,24.193 108.66,25.96 v1(110.2,27.5) ; v1(118.9,36.2) 122.7,36.2 125.1,33.8 128.358,33.8 128.467,33.908 131.725,33.908 132.224,33.409 133.928,33.409 134.869,34.35 135.81,34.35 X6.17
  Bottom Layer w0.254: v1(110.2,27.5) 117.2,34.5 117.2,34.754 117.88,35.434 118.134,35.434 v1(118.9,36.2) ; X6.17@135.81,34.73 X6.17
pin15: mcu.15 X6.18 | length 38.9
  Top Layer w0.2: 105.488,23.688 mcu.15
  Top Layer w0.254: v1(104.802,22.832) 104.802,22.952 105.247,23.397 105.247,23.447 105.488,23.688 ; v1(119.423,37.677) 122.323,37.677 125.4,34.6 133.4,34.6 X6.18
  Bottom Layer w0.254: v1(104.802,22.832) 104.802,22.952 105.257,23.407 105.257,23.59 119.344,37.677 v1(119.423,37.677)
pin16: mcu.16 X6.15 | length 76.5
  Top Layer w0.254: v1(105.023,21.177) 105.023,21.199 mcu.16 mcu.16@107.1,23.1 ; v1(115.1,45.6) 125.825,45.6 126.003,45.777 v1(126.123,45.777) ; X6.15 136.196,32.196 136.196,33.131 137.811,34.746 137.811,35.465 v1(137.823,35.477)
  Bottom Layer w0.254: v1(105.023,21.177) 104.989,21.177 103.769,22.397 103.769,29.589 105.354,31.175 105.354,33.188 106.366,34.2 114.5,34.2 116.631,36.331 116.631,40.173 115.1,41.704 v1(115.1,45.6) ; v1(126.123,45.777) 132.122,45.777 132.176,45.831 137.851,45.831 138,45.682 138,40.729 137.823,40.552 v1(137.823,35.477) ; X6.15@135.81,32.19 X6.15
pin17: mcu.17 X6.16 | length 30.9
  Top Layer w0.254: mcu.17@108.977,21.223 108.977,23.792 109.168,23.983 109.168,24.742 110.395,25.969 112.669,25.969 v1(114.9,28.2)
  Bottom Layer w0.254: v1(114.9,28.2) 114.923,28.177 129.637,28.177 X6.16
pin20: mcu.20 X6.13 | length 36.9
  Top Layer w0.254: mcu.20 110.5,22.445 109.676,23.269 109.676,24.531 110.606,25.461 113.195,25.461 116.754,29.021 116.754,31.099 119.166,33.51 119.192,33.51 119.492,33.811 123.325,33.811 126.267,30.869 134.591,30.869 X6.13
pin21: mcu.21 X6.14 | length 33.3
  Top Layer w0.2: mcu.21@111.008,21.2 111.008,22.3
  Top Layer w0.254: 111.008,22.3 111.008,22.655 110.184,23.479 110.184,24.321 110.816,24.953 113.405,24.953 117.262,28.81 117.262,30.889 118.523,32.149 118.568,32.149 119.721,33.303 123.115,33.303 126.057,30.361 130.286,30.361 131.187,29.46 X6.14
pin22: mcu.22 X6.11 | length 30.7
  Top Layer w0.254: mcu.22 111.531,21.231 111.531,22.095 111.516,22.11 111.516,22.866 110.692,23.69 110.692,24.11 111.027,24.445 113.871,24.445 115.404,25.977 v1(116.823,25.977)
  Bottom Layer w0.254: v1(116.823,25.977) 128.156,25.977 130.229,28.051 134.869,28.051 X6.11
pin23: mcu.23 X6.12 | length 26
  Top Layer w0.2: mcu.23@112.037,21.2 112.037,23.063
  Top Layer w0.254: 112.037,23.063 111.559,23.541 111.559,23.751 111.708,23.9 114.045,23.9 114.922,24.777 v1(116.823,24.777)
  Bottom Layer w0.254: v1(116.823,24.777) 131.317,24.777 X6.12
pin24: mcu.24 R6.1 | length 70.8
  Top Layer w0.2: mcu.24@112.518,21.2 112.518,22.472
  Top Layer w0.254: 112.518,22.472 112.6,22.554 112.6,22.9 113.092,23.392 114.255,23.392 114.871,24.008 116.513,24.008 117.369,23.152 117.369,22.88 118.572,21.677 v1(120.323,21.677) ; v1(127.8,52.07) R6.1
  Bottom Layer w0.254: v1(120.323,21.677) 122.944,21.677 125.266,24 131.959,24 132.71,23.249 138.349,23.249 138.7,23.6 138.7,50.951 138.462,51.189 128.411,51.189 128.092,51.508 128.092,51.657 127.8,51.949 v1(127.8,52.07)
pin26: mcu.26 R9.1 | length 42.2
  Top Layer w0.2: 113.5,19.201 mcu.26
  Top Layer w0.254: R9.1 83.2,29.363 84,28.563 v1(84,24.8) ; v1(98.7,16.4) 112.234,16.4 113.731,17.897 113.731,18.97 113.5,19.201
  Bottom Layer w0.254: v1(84,24.8) 92.4,16.4 v1(98.7,16.4)
pin27: mcu.27 R8.1 | length 47.8
  Top Layer w0.2: 113.981,19.438 mcu.27@113.981,21.2
  Top Layer w0.254: R8.1 87.512,29.564 87.512,27.189 v1(87.523,27.177) ; v1(99.423,14.977) 106.298,14.977 107.213,15.892 112.444,15.892 114.239,17.687 114.239,19.18 113.981,19.438
  Bottom Layer w0.254: v1(87.523,27.177) 85.344,27.177 83.269,25.103 83.269,24.497 92.703,15.063 99.338,15.063 v1(99.423,14.977)
pin28: C6.1 mcu.28 U5.11 | length 13.1
  Top Layer w0.254: mcu.28 114.5,19.7 114.769,19.431 114.769,17.497 116.126,16.14 117.92,16.14 U5.11 119.72,14.585 120.1,14.965 C6.1
pin29: C5.1 mcu.29 U5.10 | length 15.3
  Top Layer w0.2: 115.008,19.911 mcu.29@115.008,21.2
  Top Layer w0.254: 115.008,19.911 115.277,19.642 115.277,17.889 116.389,16.777 v1(118.823,16.777) ; v1(121.623,16.177) 122.26,15.541 U5.10@122.26,14.585 ; U5.10 U5.10@122.26,14.585 ; C5.1 122.7,15.025 U5.10@122.26,14.585
  Bottom Layer w0.254: v1(118.823,16.777) 118.828,16.777 119.428,16.177 v1(121.623,16.177)
pin30: C4.2 mcu.30 | length 2.7
  Top Layer w0.254: mcu.30 115.53,21.17 115.53,20.107 115.957,19.68 115.957,19.427 116.485,18.9 C4.2
pin31: C4.1 mcu.31 | length 8
  Top Layer w0.2: mcu.31 v1(116,22.769)
  Top Layer w0.254: C4.1 117.263,18.993 117.593,18.993 118.18,19.58 118.459,19.58 118.579,19.7 v1(118.7,19.7)
  Bottom Layer w0.254: v1(116,22.769) 116.031,22.769 116.7,22.1 117.3,22.1 117.915,21.485 117.915,20.485 v1(118.7,19.7)
pin33: mcu.33 R5.2 | length 80.2
  Top Layer w0.2: mcu.33@118.576,23.1 120.382,23.1
  Top Layer w0.254: v1(92.231,23.5) 91.4,24.331 91.4,39.551 91.549,39.7 92,39.7 95.1,42.8 97.076,42.8 98.251,43.976 R5.2 ; v1(112.8,12.2) v1(123.7,12.2) ; mcu.33 mcu.33@118.576,23.1 ; 120.382,23.1 121.3,22.182 v1(121.3,20.6)
  Bottom Layer w0.254: v1(92.231,23.5) 96.501,23.5 107.801,12.2 v1(112.8,12.2) ; v1(121.3,20.6) 125.9,16 125.9,12.949 125.596,12.645 124.265,12.645 123.821,12.2 v1(123.7,12.2)
pin34: mcu.34 R4.2 | length 80.7
  Top Layer w0.2: mcu.34@118.488,23.7 120.5,23.7
  Top Layer w0.254: v1(91.5,22) 90.7,22.8 90.7,39.8 94.49,43.59 95.827,43.59 95.9,43.663 R4.2 ; v1(112.7,11) 112.75,10.95 122.05,10.95 v1(122.1,10.9) ; 120.5,23.7 122.7,21.5 v1(122.7,20.6)
  Bottom Layer w0.254: v1(91.5,22) 97.283,22 108.283,11 v1(112.7,11) ; v1(122.1,10.9) 124.57,10.9 126.408,12.738 126.408,16.892 v1(122.7,20.6)
pin35: mcu.35 R3.2 | length 82.5
  Top Layer w0.2: mcu.35@118.488,24.208 119.117,24.208 119.126,24.199 120.71,24.199
  Top Layer w0.254: R3.2 91.3,43.663 90.1,42.463 90.1,21.9 v1(91.5,20.5) ; v1(112.7,9.1) 112.75,9.05 121.95,9.05 v1(122,9) ; 120.71,24.199 120.719,24.199 124.3,20.618 v1(124.3,20.6)
  Bottom Layer w0.254: v1(91.5,20.5) 96.4,20.5 107.8,9.1 v1(112.7,9.1) ; v1(122,9) 123.388,9 126.916,12.528 126.916,17.984 v1(124.3,20.6)
pin36: C3.1 mcu.36 U5.9 | length 18.5
  Top Layer w0.2: mcu.36@118.488,24.707 119.111,24.707 119.126,24.692 122.481,24.692 122.493,24.68
  Top Layer w0.254: 122.493,24.68 122.52,24.68 126.3,20.9 126.3,15.84 125.6,15.14 ; U5.9 125.6,15.14 ; C3.1 125.6,15.14
pin37: mcu.37 X7.2 | length 114.1
  Top Layer w0.2: mcu.37 121.412,25.188
  Top Layer w0.254: 121.412,25.188 123.512,25.188 v1(125.5,23.2)
  Bottom Layer w0.254: X7.2 63.9,16.2 74.6,16.2 76.1,14.7 76.1,1 127.351,1 127.5,1.149 127.5,18.118 125.5,20.118 v1(125.5,23.2)
pin38: mcu.38 X7.3 | length 115.8
  Top Layer w0.2: mcu.38@118.488,25.68 123.988,25.68
  Top Layer w0.254: 123.988,25.68 124.42,25.68 v1(126.9,23.2)
  Bottom Layer w0.254: X7.3 61.922,17.46 63.782,15.6 74.2,15.6 75.5,14.3 75.5,0.492 128.043,0.492 128.2,0.649 128.2,21.9 v1(126.9,23.2)
pin39: C2.1 mcu.39 U5.3 | length 48.7
  Top Layer w0.254: C2.1@116.03,2.3 116.015,2.3 114.159,4.156 114.159,4.341 U5.3 113.6,7.9 125.951,7.9 128.252,10.201 128.252,25.248 127.299,26.201 123.202,26.201 123.189,26.188 mcu.39
pin40: C1.1 mcu.40 U5.7 | length 39.8
  Top Layer w0.2: mcu.40@118.488,26.709 127.509,26.709
  Top Layer w0.254: C1.1@125.83,2.3 125.83,2.83 U5.7 123.441,6.4 124.433,7.392 126.162,7.392 128.76,9.99 128.76,25.458 127.509,26.709
pin41: mcu.41 X6.4 | length 22.1
  Top Layer w0.2: mcu.41@118.488,27.217 119.1,27.217 119.126,27.192 127.718,27.192 127.72,27.19
  Top Layer w0.254: 127.72,27.19 127.747,27.19 129.268,25.669 129.268,24.099 130.471,22.896 130.471,19.749 X6.4
pin42: mcu.42 X6.3 | length 24.7
  Top Layer w0.2: mcu.42@118.488,27.692 123.796,27.692
  Top Layer w0.254: 123.796,27.692 123.832,27.728 127.928,27.728 129.776,25.879 129.776,24.309 130.979,23.107 130.979,20.182 132.992,18.169 133.65,18.169 134.869,16.95 135.81,16.95 X6.3
pin43: mcu.43 X6.6 | length 20.8
  Top Layer w0.2: mcu.43@118.488,28.2 121.8,28.2
  Top Layer w0.254: 121.8,28.2 121.837,28.237 128.137,28.237 130.284,26.09 130.284,24.52 131.487,23.317 131.487,21.273 X6.6
pin44: mcu.44 X6.5 | length 23.4
  Top Layer w0.2: mcu.44@118.488,28.746 128.346,28.746
  Top Layer w0.254: 128.346,28.746 130.792,26.3 130.792,24.73 131.995,23.527 131.995,21.706 133.078,20.622 134.678,20.622 X6.5
pin45: mcu.45 X6.8 | length 19.5
  Top Layer w0.2: mcu.45@118.488,29.2 119.388,29.2 119.395,29.207 123.821,29.207 123.868,29.254 128.556,29.254
  Top Layer w0.254: 128.556,29.254 131.3,26.511 131.3,24.941 132.503,23.738 132.503,22.797 X6.8
pin46: mcu.46 X9.1 X16.5 | length 60.8
  Top Layer w0.2: mcu.46 123.188,29.688
  Top Layer w0.254: X16.5 121.66,52.18 X9.1 ; 123.188,29.688 123.622,29.688 123.696,29.762 130.167,29.762 131.729,28.2 139.251,28.2 139.4,28.349 139.4,37.819 136.19,41.029 132.992,41.029 128.3,45.721 v1(128.3,50.1)
  Bottom Layer w0.254: X9.1 123.74,50.1 v1(128.3,50.1)
pin48: "touch panel.1" C17.1 C20.1 mcu.1 mcu.13 mcu.19 mcu.32 mcu.48 mcu.64 R1.2 R13.1 U4.4 U5.16 X12.1 | length 139
  Top Layer w0.2: 110.008,19.244 mcu.19@110.008,21.2 ; mcu.48@118.488,30.7 119.7,30.7
  Top Layer w0.254: U4.4 71.275,20.55 71.798,21.073 71.798,21.948 75.4,25.55 C17.1 ; C17.1@75.508,25.457 76.265,24.7 v1(80.6,24.7) ; v1@101.5,13.466 102,12.966 R13.1 ; R13.1@102.073,11.935 C20.1 ; R1.2 108.976,35.976 109,36 ; U5.16@106.517,14.167 U5.16@106.847,14.167 ; mcu.1 108.131,30.688 108.319,30.5 108.585,30.5 ; 110.008,19.244 107.964,17.2 ; X12.1 109.669,46.569 109.669,44.297 ; v1(113,18.2) 112,17.2 107.964,17.2 ; mcu.32 116.5,20.801 v1(117.423,19.877) ; 119.7,30.7 120.569,31.569 120.569,32.538 v1(120.602,32.572) ; v1(122.623,43.477) 110.489,43.477 109.669,44.297 ; 107.964,17.2 v1(105.6,17.2) 103.9,17.2 102.1,19 102.1,21.163 104.499,23.563 104.57,23.563 105.695,24.688 mcu.13 108.003,24.688 108.152,24.837 108.152,27.452 108.585,27.885 108.585,30.5 ; 108.585,30.5 108.851,30.5 109,30.649 mcu.64 109,36 ; 109,36 109,37.566 108.869,37.697 108.869,43.497 109.669,44.297
  Top Layer w0.5: C20.1@104.3,11.95 U5.16@106.517,14.167
  Bottom Layer w0.254: v1(80.6,24.7) 90.629,14.671 92.378,14.671 93.319,13.73 94.26,13.73 94.45,13.54 ; v1(105.6,17.2) 107.02,15.78 U5.16 ; v1(113,18.2) 115.746,18.2 v1(117.423,19.877) ; v1(120.602,32.572) 120.602,32.602 122.5,34.5 122.5,35 122.623,35.123 v1(122.623,43.477)
  Bottom Layer w0.5: 94.47,13.52 v1@101.48,13.52
  other v1: 101.5,13.5
pin49: mcu.49 X10.1 X16.3 | length 28.6
  Top Layer w0.2: mcu.49@116.531,32.676 116.531,33.295 116.55,33.314 116.744,33.314 116.873,33.442
  Top Layer w0.254: X16.3 116.58,52.56 X10.1 ; 116.873,33.442 117.063,33.633 117.258,33.633 117.703,34.077 v1(117.823,34.077)
  Bottom Layer w0.254: v1(117.823,34.077) 121.5,37.754 121.5,49.891 121.351,50.04 X10.1
pin50: mcu.50 X6.9 | length 32.8
  Top Layer w0.2: mcu.50 116,34.262 116.027,34.289
  Top Layer w0.254: 116.027,34.289 116.027,34.327 116.508,34.808 123.046,34.808 124.677,33.177 v1(130.323,33.177) ; X6.9@135.81,24.19 X6.9
  Bottom Layer w0.254: v1(130.323,33.177) 136.422,33.177 137.131,32.468 137.131,25.511 X6.9
pin51: mcu.51 R16.2 | length 100.2
  Top Layer w0.2: mcu.51 115.5,34.891
  Top Layer w0.254: R16.2 39.737,21.8 39.81,21.727 39.81,21.614 40.716,20.708 40.716,19.985 v1(40.723,19.977) ; v1(95.623,38.877) 96.723,37.777 v1(101.223,37.777) ; 115.5,34.891 115.9,35.291 v1(115.9,36.7)
  Bottom Layer w0.254: v1(40.723,19.977) 40.723,22.778 40.304,23.198 40.304,28.561 43.632,31.889 58.493,31.889 62.771,27.611 76.914,27.611 85.295,35.992 93.81,35.992 94.338,36.519 94.338,37.592 v1(95.623,38.877) ; v1(101.223,37.777) 102.301,36.7 v1(115.9,36.7)
pin52: mcu.52 R17.2 | length 113.5
  Top Layer w0.2: mcu.52 115,34.441
  Top Layer w0.254: R17.2 38.413,5.588 v1(40.123,3.877) ; v1(95.723,36.977) 96.823,35.877 v1(100.323,35.877) ; v1(114.8,35.6) 114.8,34.641 115,34.441
  Bottom Layer w0.254: v1(40.123,3.877) 40.123,5.923 42.671,8.471 42.671,30.21 43.842,31.381 58.282,31.381 62.56,27.103 77.124,27.103 85.505,35.484 94.23,35.484 v1(95.723,36.977) ; v1(100.323,35.877) 100.444,35.877 100.721,35.6 v1(114.8,35.6)
pin53: C9.1 mcu.53 U5.6 | length 36.9
  Top Layer w0.2: 114.5,30.9 mcu.53
  Top Layer w0.254: v1(113.9,28.7) 113.9,28.713 114.5,29.313 114.5,30.9 ; U5.6 119.893,6.227 119.893,5.792 123.385,2.3 C9.1@123.4,2.3
  Bottom Layer w0.254: v1(113.9,28.7) 113.9,25.901 114.3,25.501 114.3,22.823 112.608,21.131 112.608,19.473 112.269,19.134 112.269,17.631 114.091,15.809 115.248,15.809 116.109,14.948 116.109,13.791 119.72,10.18 U5.6
pin54: C10.1 mcu.54 U5.5 | length 36.3
  Top Layer w0.2: 113.992,30.926 mcu.54@113.992,32.676
  Top Layer w0.254: v1(112.4,27.1) 112.4,27.977 112.1,28.277 112.1,29.034 113.992,30.926 ; U5.5 119.199,4.381 119.199,4.116 121.015,2.3 C10.1
  Bottom Layer w0.254: v1(112.4,27.1) 112.4,21.641 112.1,21.341 112.1,19.683 111.761,19.344 111.761,17.239 113.699,15.301 115.038,15.301 115.601,14.738 115.601,13.942 115.435,13.776 115.435,13.565 115.601,13.399 115.601,7.979 U5.5
pin55: mcu.55 X11.1 X16.2 | length 27.1
  Top Layer w0.2: mcu.55 113.5,35.318 113.516,35.334
  Top Layer w0.254: 113.516,35.334 113.516,35.35 117.444,39.277 v1(118.223,39.277) ; X16.2 114.04,50 X11.1
  Bottom Layer w0.254: X11.1 118.223,45.817 v1(118.223,39.277)
pin56: mcu.56 X6.19 | length 30.4
  Top Layer w0.2: mcu.56@113.008,32.676 113.008,36.345 113.04,36.376
  Top Layer w0.254: 113.04,36.376 114.824,38.161 114.824,38.224 116.608,40.008 124.196,40.008 128.256,35.949 134.869,35.949 X6.19
pin57: mcu.57 X6.20 | length 27.9
  Top Layer w0.2: mcu.57 112.5,36.555 112.54,36.595
  Top Layer w0.254: 112.54,36.595 114.316,38.371 114.316,38.434 116.398,40.516 130.024,40.516 X6.20
pin58: mcu.58 X6.21 | length 31.4
  Top Layer w0.2: mcu.58 112,36.729 112.008,36.737
  Top Layer w0.254: 112.008,36.737 112.008,36.782 113.808,38.582 113.808,38.645 116.188,41.024 130.234,41.024 132.769,38.489 133.928,38.489 134.869,39.43 135.81,39.43 X6.21
pin59: mcu.59 X6.22 | length 29
  Top Layer w0.2: mcu.59 111.5,36.992 111.608,37.1
  Top Layer w0.254: 111.608,37.1 111.608,37.208 115.932,41.532 130.444,41.532 132.329,39.648 133.432,39.648 X6.22
pin60: mcu.60 R2.2 | length 6.5
  Top Layer w0.2: mcu.60@111.019,32.695 111.019,37.191
  Top Layer w0.254: mcu.60 mcu.60@111.019,32.695 ; 111.019,37.191 111.1,37.272 R2.2
pin61: C11.1 mcu.61 U5.4 | length 34.1
  Top Layer w0.2: 110.5,30.701 mcu.61
  Top Layer w0.254: 110.5,30.701 111.5,29.701 111.5,27.661 111.397,27.558 111.397,26.703 v1(111.4,26.7) ; U5.4 114.64,6.175 118.515,2.3 C11.1
  Bottom Layer w0.254: v1(111.4,26.7) 111.4,21.316 111.023,20.94 111.023,16.977 113.061,14.939 113.061,14.56 114.64,12.981 U5.4
pin62: mcu.62 R15.2 | length 89.9
  Top Layer w0.254: v1(40.2,39.5) R15.2 ; v1(96.123,40.277) 97.423,38.977 v1(100.223,38.977) ; v1(109.6,38) 109.6,37.794 109.969,37.425 109.969,32.707 mcu.62
  Bottom Layer w0.254: v1(40.2,39.5) 40.2,39.379 40.6,38.979 40.6,36.861 44.971,32.49 58.61,32.49 62.981,28.119 69.831,28.119 70.412,28.7 77.284,28.7 85.084,36.5 93.451,36.5 93.6,36.649 93.6,37.888 95.321,39.608 95.454,39.608 v1(96.123,40.277) ; v1(100.223,38.977) 104.423,38.977 105.4,38 v1(109.6,38)
Q1_R3: Q1.1 R3.1 | length 3.3
  Top Layer w0.254: R3.1 91.3,47.35 91.55,47.6 Q1.1
Q2_R4: Q2.1 R4.1 | length 3.2
  Top Layer w0.254: R4.1 95.925,44.625 95.925,47.725 Q2.1
Q3_R5: Q3.1 R5.1 | length 3
  Top Layer w0.254: Q3.1 100.275,47.725 100.275,44.825 R5.1
Q5_Q7: Q5.3 Q7.1 R10.2 | length 15
  Top Layer w0.254: R10.2@80.2,45.175 R10.2 ; Q7.1 81.42,36.68 85.45,32.65 Q5.3
  Top Layer w0.7: R10.2@80.2,45.175 81.42,43.955 Q7.1
Q6_Q8: Q6.3 Q8.1 R11.2 | length 19.6
  Top Layer w0.254: Q8.1@69.3,39.62 Q8.1 73.25,35.67 77.43,35.67 80.3,32.8 Q6.3
  Top Layer w0.7: Q8.1@69.3,39.62 R11.2
Q7_D2: D2.2 Q7.2 X4.1 | length 20.8
  Top Layer w0.254: D2.2@83.2,51.1 D2.2 ; Q7.2 Q7.2@84.095,39.335
  Top Layer w0.7: D2.2@83.2,51.1 X4.1 ; D2.2 85.837,48.463 87.037,48.463 89.095,46.405 89.095,45.616 84.095,40.616 Q7.2@84.095,39.335
Q8_D1: D1.2 Q8.2 X5.1 | length 21.6
  Top Layer w0.7: X5.1 D1.2 74.245,49.155 76.245,49.155 77.9,47.5 77.9,45.04 Q8.2
Q10_J1: C27.1 C28.2 J1.1 Q10.1 | length 32.4
  Top Layer w0.254: J1.1@8.1,17.72 J1.1
  Top Layer w0.7: J1.1 17.61,17.79 C27.1
  Top Layer w0.8: C28.2 22.9,7.2 C27.1
  Top Layer w0.9: Q10.1 J1.1@8.1,17.72
Q11_J1: C24.2 C25.2 J1.2 Q11.1 | length 28.2
  Top Layer w0.8: C24.2 22.6,29.9 C25.2
  Top Layer w0.9: Q11.1 5.575,26.045 J1.2
  Bottom Layer w0.9: J1.2 18.745,26.045 C24.2
Q12_J1: J1.3 Q12.1 | length 13.5
  Top Layer w0.7: Q12.1 2.8,39.6 J1.3
R6_Q4: Q4.1 R6.2 | length 2.5
  Top Layer w0.254: R6.2 127.825,54.025 127.825,56.425 Q4.1
R7_NC: R7.1 X6.30 | length 5.7
  Top Layer w0.254: R7.1 129.2,53.075 129.273,53.002 129.386,53.002 132.37,50.018 133.222,50.018 X6.30
R7_Q4: Q4.3 R7.2 | length 4.8
  Top Layer w0.2: 128.5,55.1 Q4.3
  Top Layer w0.254: 128.5,55.1 128.5,54.825 129.2,54.125 R7.2
R8_Q5: Q5.1 R8.2 | length 4.8
  Top Layer w0.254: Q5.1 86.1,34.45 87.5,33.05 R8.2
R9_Q6: Q6.1 R9.2 | length 5.4
  Top Layer w0.254: Q6.1 80.95,34.6 83.2,32.35 R9.2
R10_D2: C18.1 C34.1 D1.1 D2.1 R10.1 R11.1 X2.4 X4.2 X5.2 | length 55.2
  Top Layer w0.254: 79.39,59.99 79.4,60 ; 80.888,46.112 80.9,46.1
  Top Layer w0.7: X5.2 68.29,52.31 D1.1 R11.1 C34.1 ; X4.2 79.39,52.11 D2.1 80.5,47.225 80.2,46.925 R10.1 80.888,46.112 ; 80.9,46.1 C18.1
  Top Layer w1: X5.2 73.39,60 79.4,60 86.6,60 X2.4 ; X4.2 79.39,59.99
R12_Q9: Q9.1 R12.1 | length 5.4
  Top Layer w0.254: R12.1 103.8,3.611 102.644,4.767 102.644,5.994 Q9.1@103.95,7.3
R12_TP: "touch panel.2" R12.2 | length 14.7
  Top Layer w0.254: v1(101.2,3.9) 102.2,2.9 R12.2
  Bottom Layer w0.254: 93.18,11 94.677,9.503 98.203,9.503 101.2,6.506 v1(101.2,3.9)
R15_U6: R15.1 U6.1 | length 15.4
  Top Layer w0.254: U6.1 35.46,47.76 35.7,48 42.351,48 42.5,47.851 42.5,45.024 40.2,42.725 R15.1
R17_U8: R17.1 U8.1 | length 4.4
  Top Layer w0.254: U8.1 35.66,7.665 36.8,6.525 R17.1
R18_R20: R18.1 R20.1 | length 6.8
  Top Layer w0.254: R20.1 R20.1@29.6,53.875
  Top Layer w0.8: R20.1@29.6,53.875 32.3,56.575 R18.1
R20_Q12: J1.4 Q10.2 Q11.2 Q12.2 R20.2 R24.1 R25.2 R28.1 R29.2 | length 117.5
  Top Layer w0.254: 7.951,48.16 8.1,48.011 ; v1(28.123,19.577) 30.377,19.577 30.4,19.6 ; R29.2 30.4,19.6 ; R28.1 30.4,16.7 30.4,19.6 ; R25.2 R25.2@30.6,45.975
  Top Layer w0.7: Q12.2 7.951,48.16 ; 8.1,48.011 J1.4 19.045,53.5 R20.2
  Top Layer w0.8: R20.2 26.6,49.975 R25.2@30.6,45.975 ; R24.1 R25.2
  Bottom Layer w0.254: 0.4,31.451 0.549,31.6 ; Q11.2@2.56,31.6 Q11.2
  Bottom Layer w0.5: 0.4,21.2 24.735,21.2 25.91,20.024 27.676,20.024 v1(28.123,19.577)
  Bottom Layer w0.9: 0.4,31.451 0.4,21.2 0.4,17.36 Q10.2 ; 0.549,31.6 Q11.2@2.56,31.6 ; Q11.2 8.1,37.06 J1.4
R22_R24: C24.1 R22.1 R24.2 | length 13.2
  Top Layer w0.8: R24.2 R22.1 27.6,32.1 C24.1
R25_C25: C25.1 R25.1 | length 5.1
  Top Layer w0.254: R25.1@27.3,45.3 R25.1
  Top Layer w0.8: C25.1 R25.1@27.3,45.3
R26_R28: C28.1 R26.1 R28.2 | length 12.6
  Top Layer w0.254: R28.2 27.6,11.4 R26.1 27.5,10.925 31.1,7.325 C28.1
R29_C27: C27.2 R29.1 | length 5.2
  Top Layer w0.254: R29.1 R29.1@27.4,21.775
  Top Layer w0.8: C27.2 26.675,22.5 R29.1@27.4,21.775
R30_D3: D3.1 R30.2 | length 2.4
  Top Layer w0.254: D3.1 106.5,44.8 R30.2
smdLed1: D3.2 X11.2 | length 14.5
  Top Layer w0.254: D3.2 108.5,45.6 v1(108.5,44.8)
  Bottom Layer w0.254: v1(108.5,44.8) 110.5,42.8 113.5,42.8 114.2,43.5 X11.2
TP_pin1:  | length 0.2
  Top Layer w0.254: 101.5,13.466 101.5,13.5 ; 102,12.012 102,12.008 102.073,11.935 ; 104.3,11.935 104.3,11.95
  Bottom Layer w0.254: 101.48,13.52 101.5,13.5
U2_C13: C13.2 U2.2 X7.1 | length 22.3
  Top Layer w0.254: U2.2 52.9,11.025 53.248,11.373 53.423,11.373
  Top Layer w0.7: C13.2 59.04,23.6 X7.1
  Top Layer w0.8: 53.423,11.373 56.189,14.139 56.189,18.629 X7.1
U3_U2: C12.1 U2.3 U3.3 X3.1 | length 50.2
  Top Layer w0.254: U3.3 U3.3@49.358,38.298
  Top Layer w0.8: U3.3 49.01,12.45 U2.3 ; U3.3@49.358,38.298 49.358,41.529 50.9,43.071 C12.1 52.52,48.22 X3.1
U5_pin1: C21.1 R14.1 | length 5.4
  Top Layer w0.254: 107.02,6.4 107.02,3.855 107.575,3.3 R14.1 107.659,3.271 107.659,1.429 C21.1
U5_pin2: Q9.3 R13.2 U5.2 | length 13
  Top Layer w0.254: R13.2 102,11.075 102.073,11.002 102.186,11.002 103.494,9.694 105.494,7.694 105.827,7.361 ; Q9.3 103.816,5.35 105.827,7.361 ; U5.2 109.44,6.52 108.599,6.52 107.758,7.361 105.827,7.361
U5_pin12: C7.1 mcu.25 U5.12 | length 18.1
  Top Layer w0.254: mcu.25 113.031,21.231 113.031,22.168 113.747,22.884 114.717,22.884 115.333,23.5 116.303,23.5 116.861,22.941 116.861,22.67 119.531,20 119.531,19.235 118.765,18.469 117.845,18.469 117.554,18.178 117.554,17.854 C7.1 v1(116.4,17.8)
  Bottom Layer w0.254: v1(116.4,17.8) 117.18,17.02 U5.12
U6_Q12: Q12.3 U6.4 | length 51.1
  Top Layer w0.254: 40.451,62.1 40.6,61.951 ; U6.4 U6.4@40.6,53.47
  Top Layer w0.5: Q12.3 14.2,62.1 40.451,62.1 ; U6.4@40.6,53.47 40.6,61.951
U6_R18: R18.2 U6.6 | length 5.9
  Top Layer w0.254: R18.2 R18.2@35.46,59.04
  Top Layer w0.8: U6.6 R18.2@35.46,59.04
U7_Q11: Q11.3 U7.4 | length 45.9
  Top Layer w0.7: 31.714,24.8 36.856,29.943 38.073,29.943 U7.4
  Top Layer w0.9: Q11.3 11.9,24.8 31.714,24.8
U7_R16: R16.1 U7.1 | length 15
  Top Layer w0.254: U7.1 36.16,26.96 36.7,27.5 41,27.5 42.176,26.324 42.176,25.102 41.951,24.878 41.951,23.651 41.8,23.5 40.273,23.5 38.931,22.158 38.931,21.873 38.858,21.8 R16.1
U7_R22: R22.2 U7.6 | length 6.2
  Top Layer w0.254: R22.2@30.6,33.725 R22.2
  Top Layer w0.8: R22.2@30.6,33.725 31.215,33.11 U7.6
U8_Q10: Q10.3 U8.4 | length 43.6
  Top Layer w0.7: v1(32.623,12.277) 33.891,12.277 36.487,14.873 37.703,14.873 U8.4
  Bottom Layer w0.7: Q10.3 5.211,17.5 6.661,18.949 25.951,18.949 v1(32.623,12.277)
U8_R26: R26.2 U8.6 | length 8.7
  Top Layer w0.8: R26.2 30.5,12.75 U8.6
VOLT5: C15.2 C16.2 U3.2 U4.3 X6.1 X6.2 | length 133.1
  Top Layer w0.254: U3.2 U3.2@51.4,38.05 ; 51.4,39.751 51.549,39.9 ; C15.2@59.15,37.9 C15.2 C15.2@59.4,37.7 ; U4.3@67.662,27.773 68,27.435 68.01,27.425 U4.3
  Top Layer w0.5: 75.3,5.381 80.055,0.626 126.826,0.626
  Top Layer w0.8: U3.2@51.4,38.05 51.4,39.751 ; 51.549,39.9 57.15,39.9 C15.2@59.15,37.9 ; C15.2@59.4,37.7 62.451,37.7 63.12,37.032 63.12,28.441 63.788,27.773 65.2,27.773 ; U4.3@67.662,27.773 65.2,27.773 ; U4.3@68,27.435 C16.2 ; 75.3,5.381 75.3,11.527 65.2,21.627 65.2,27.773 ; 126.826,0.626 132.544,6.344 132.57,6.406 132.616,6.452 132.64,6.488 132.64,6.561 133.46,7.38 X6.2 X6.1
X2_Q1: Q1.3 X2.3 | length 6.8
  Top Layer w0.254: Q1.3 Q1.3@92.2,50
  Top Layer w0.7: Q1.3@92.2,50 94.4,52.2 X2.3